# Altium PCB atfc.PcbDoc
Units mil, origin at the board's own origin, x right, y up, seen from the top; angles counter-clockwise.
Board outline 6000 x 4000 mil, 2 copper layers (Top Layer, Bottom Layer); 12 components, 0 nets, 798 pads, 0 vias.
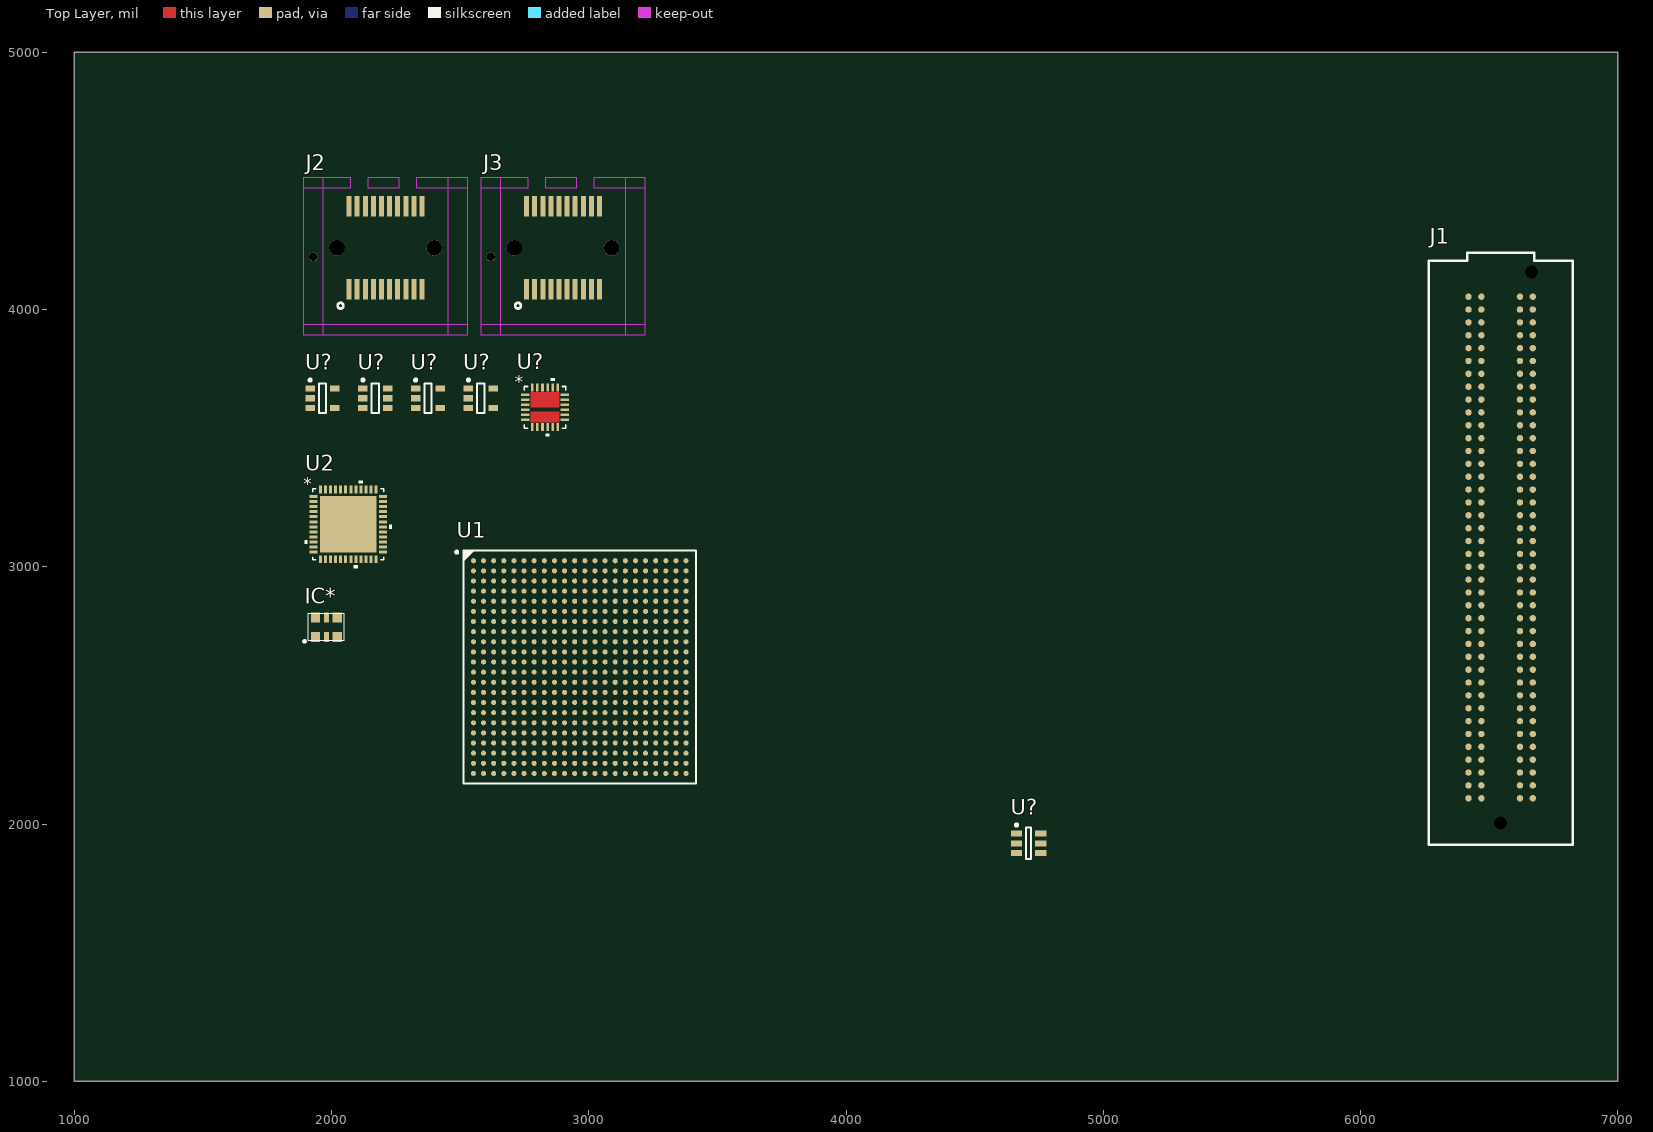
[diagram p0: Top Layer view]
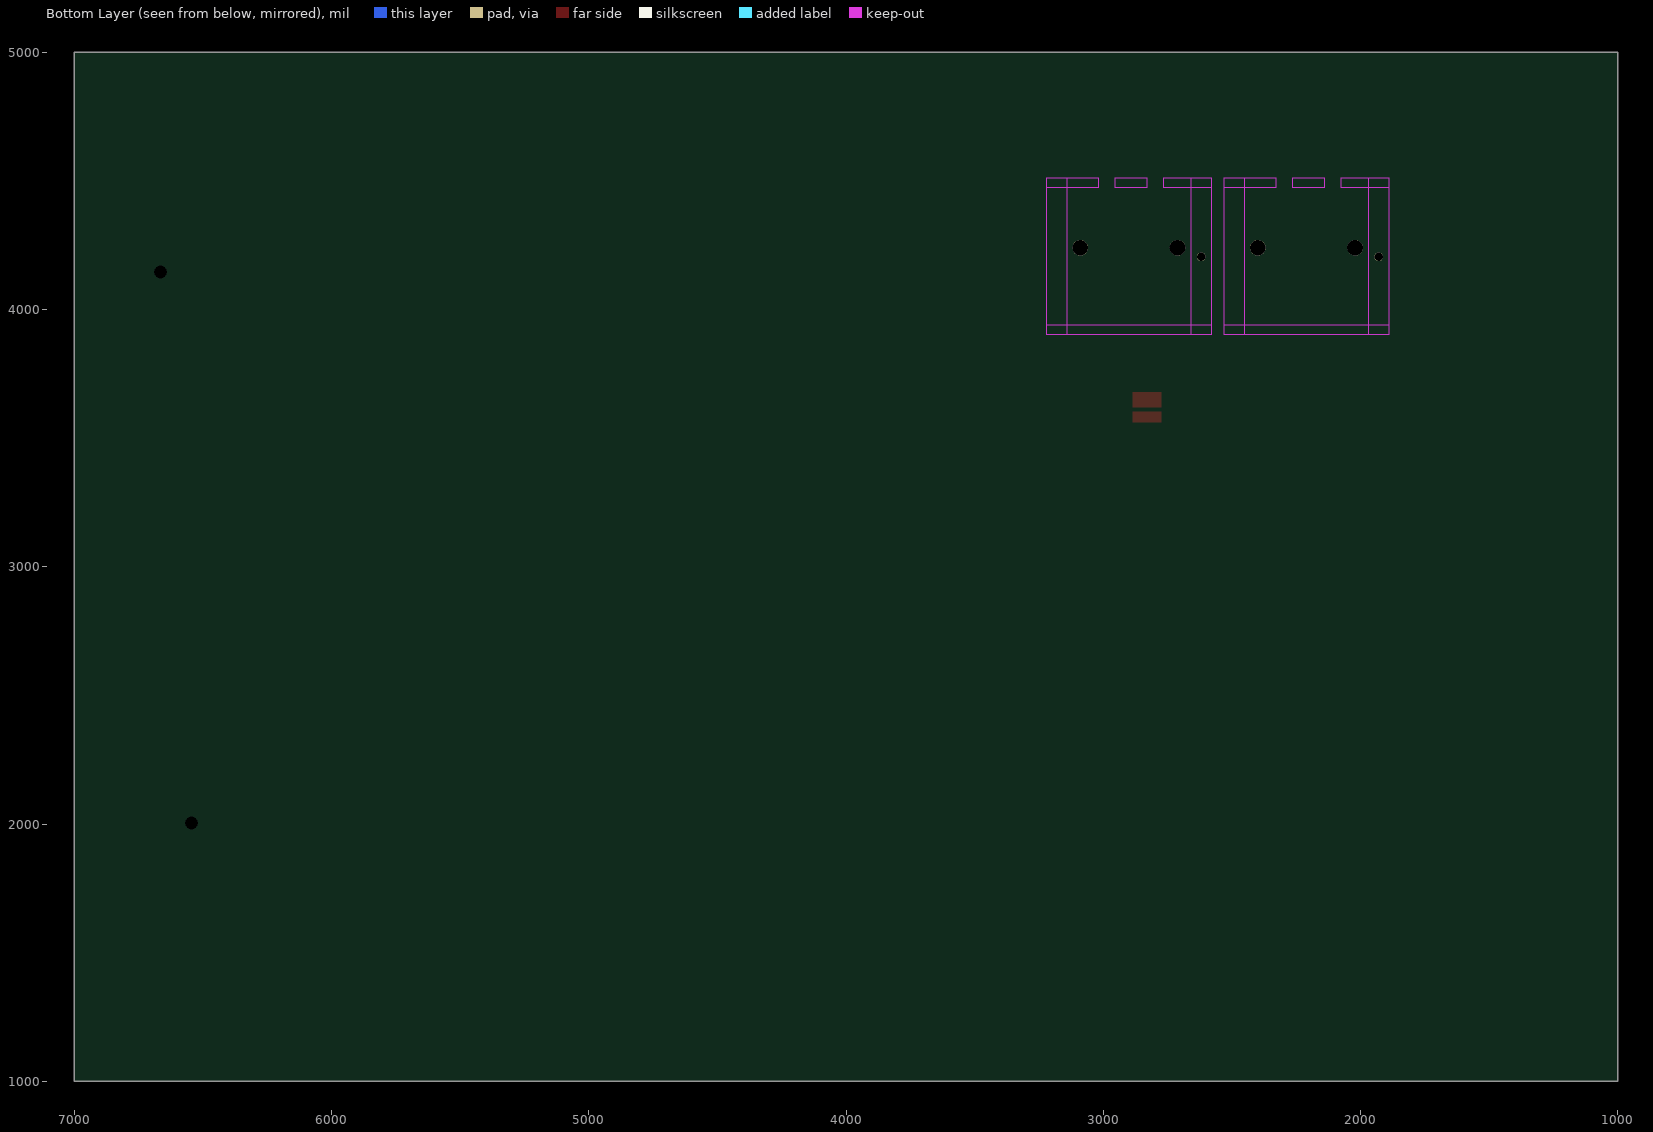
[diagram p1: Bottom Layer view, seen from below]

## Layer stack, top to bottom
Top Solder: solder mask 0.4, Solder Resist, Dk 3.5
Top Layer: signal copper 1.4
Dielectric 1: dielectric 12.6, FR-4, Dk 4.8
Bottom Layer: signal copper 1.4
Bottom Solder: solder mask 0.4, Solder Resist, Dk 3.5

## Board outline
1000,1000 7000,1000 7000,5000 1000,5000

## Design rules (kind name [scope] priority, off if disabled: settings)
Clearance [All] p1: gap=10 ignorepadtopadclearanceinfootprint=FALSE except(0: Arc-Hole Track-Hole SMDPad-Hole THPad-Hole Via-Hole Fill-Hole Poly-Hole Region-Hole Text-Hole)
PolygonConnect [All] p1: connectstyle=Relief reliefconductorwidth=10 reliefentries=4 polygonreliefangle="90 Angle" airgapwidth=10
RoutingVias [All] p1: holewidth=28 width=50 viastyle="Through Hole" minholewidth=28 minwidth=50 maxholewidth=28 maxwidth=50
SolderMaskExpansion [All] p1: expansion=4
Width [All] p1: maxlimit=10 minlimit=10 preferedwidth=10
30 further rules are at their usual default settings.

## Classes and differential pairs
component class SFP: J2 J3
component class Regulators: U1 U2
component class PWR_APD5052: U2
component class IO: IC*
component class FPGA_Banks1: U1 U2
component class FMC: J1
component class Config: U1 U2

## Components (designator, comment, footprint, x,y, rotation, side; value= is the part's Value field where it differs from the comment)
IC* "DSC1123CE1-125.0000" DSC1123_32_25 1980,2765 r0 top
J1 "ASP-134603-01" ASP-134603-01 6545,3075 r90 top
J2 "SFP+" SFP+20 2210,4205 r0 top
J3 "SFP+" SFP+20 2900,4205 r0 top
U1 "XC7A35T-1FGG484C" FGG484 2965,2610 r0 top
U2 "ADP5052ACPZ-R7" CP_48_13 2065,3165 r0 top value=Value
U? "24AA025E48T-I/OT" MCHP-SOT-23-OT6_N 4710,1925 r0 top
U? "ADP123AUJZ-R7" ADI-UJ-5_N 2375,3655 r0 top
U? "ADP123AUJZ-R7" ADI-UJ-5_N 2580,3655 r0 top
U? "ADP123AUJZ-R7" ADI-UJ-5_N 1965,3655 r0 top
U? "ADR127BUJZ-REEL7" ADI-UJ-6_N 2170,3655 r0 top
U? "ADP2384ACPZN-R7" CP_24_12 2830,3620 r0 top value=Value

## Footprints (in the part's own frame and the unit in brackets; to place one, negate y for a bottom-side part, rotate by r counter-clockwise, add the part's x,y. Pads: shape width x height; smd on the part's side, far side on the other; paste and mask are expansions set on the pad)
ADI-UJ-5_N [mm] "SOT23, 5-Leads, Body 2.9x1.6mm, Pitch 0.95mm, IPC Medium Density"
  rect 0.95x0.6 smd: 1(-1.225,0.95) 2(-1.225,0) 3(-1.225,-0.95) 4(1.225,-0.95) 5(1.225,0.95)
  silkscreen extent -1.35,-1.45 0.35,1.92, body extent -0.8,-1.45 0.8,1.45, height 1
ADI-UJ-6_N [mm] "SOT23, 6-Leads, Body 2.9x1.6mm, Pitch 0.95mm, IPC Medium Density"
  rect 0.95x0.6 smd: 1(-1.225,0.95) 2(-1.225,0) 3(-1.225,-0.95) 4(1.225,-0.95) 5(1.225,0) 6(1.225,0.95)
  silkscreen extent -1.35,-1.45 0.35,1.92, body extent -0.8,-1.45 0.8,1.45, height 1
ASP-134603-01 [mil]
  round 25 smd paste+5 mask+2: C1(975,-125) C2(925,-125) C3(875,-125) C4(825,-125) C5(775,-125) C6(725,-125) C7(675,-125) C8(625,-125) C9(575,-125) C10(525,-125) C11(475,-125) C12(425,-125) C13(375,-125) C14(325,-125) C15(275,-125) C16(225,-125) C17(175,-125) C18(125,-125) C19(75,-125) C20(25,-125) C21(-25,-125) C22(-75,-125) C23(-125,-125) C24(-175,-125) C25(-225,-125) C26(-275,-125) C27(-325,-125) C28(-375,-125) C29(-425,-125) C30(-475,-125) C31(-525,-125) C32(-575,-125) C33(-625,-125) C34(-675,-125) C35(-725,-125) C36(-775,-125) C37(-825,-125) C38(-875,-125) C39(-925,-125) C40(-975,-125) D1(975,-75) D2(925,-75) D3(875,-75) D4(825,-75) D5(775,-75) D6(725,-75) D7(675,-75) D8(625,-75) D9(575,-75) D10(525,-75) D11(475,-75) D12(425,-75) D13(375,-75) D14(325,-75) D15(275,-75) D16(225,-75) D17(175,-75) D18(125,-75) D19(75,-75) D20(25,-75) D21(-25,-75) D22(-75,-75) D23(-125,-75) D24(-175,-75) D25(-225,-75) D26(-275,-75) D27(-325,-75) D28(-375,-75) D29(-425,-75) D30(-475,-75) D31(-525,-75) D32(-575,-75) D33(-625,-75) D34(-675,-75) D35(-725,-75) D36(-775,-75) D37(-825,-75) D38(-875,-75) D39(-925,-75) D40(-975,-75) G1(975,75) G2(925,75) G3(875,75) G4(825,75) G5(775,75) G6(725,75) G7(675,75) G8(625,75) G9(575,75) G10(525,75) G11(475,75) G12(425,75) G13(375,75) G14(325,75) G15(275,75) G16(225,75) G17(175,75) G18(125,75) G19(75,75) G20(25,75) G21(-25,75) G22(-75,75) G23(-125,75) G24(-175,75) G25(-225,75) G26(-275,75) G27(-325,75) G28(-375,75) G29(-425,75) G30(-475,75) G31(-525,75) G32(-575,75) G33(-625,75) G34(-675,75) G35(-725,75) G36(-775,75) G37(-825,75) G38(-875,75) G39(-925,75) G40(-975,75) H1(975,125) H2(925,125) H3(875,125) H4(825,125) H5(775,125) H6(725,125) H7(675,125) H8(625,125) H9(575,125) H10(525,125) H11(475,125) H12(425,125) H13(375,125) H14(325,125) H15(275,125) H16(225,125) H17(175,125) H18(125,125) H19(75,125) H20(25,125) H21(-25,125) H22(-75,125) H23(-125,125) H24(-175,125) H25(-225,125) H26(-275,125) H27(-325,125) H28(-375,125) H29(-425,125) H30(-475,125) H31(-525,125) H32(-575,125) H33(-625,125) H34(-675,125) H35(-725,125) H36(-775,125) H37(-825,125) H38(-875,125) H39(-925,125) H40(-975,125)
  round 0 hole 50 unplated: MH1(1070.5,-120) MH2(-1070.5,0)
  silkscreen extent -1155,-280 1145,280, body extent -1131,-295 1151,283, height 259
CP_24_12 [mm]
  rect 0.805x0.25 smd: 1(-1.952,1.25) 2(-1.952,0.75) 3(-1.952,0.25) 4(-1.952,-0.25) 5(-1.952,-0.75) 6(-1.952,-1.25) 13(1.952,-1.25) 14(1.952,-0.75) 15(1.952,-0.25) 16(1.952,0.25) 17(1.952,0.75) 18(1.952,1.25)
  rect 0.25x0.805 smd: 7(-1.25,-1.952) 8(-0.75,-1.952) 9(-0.25,-1.952) 10(0.25,-1.952) 11(0.75,-1.952) 12(1.25,-1.952) 19(1.25,1.952) 20(0.75,1.952) 21(0.25,1.952) 22(-0.25,1.952) 23(-0.75,1.952) 24(-1.25,1.952)
  Top Layer region: -1.4,-1.5 -1.4,-0.45 1.4,-0.45 1.4,-1.5
  Top Layer region: -1.4,0 -1.4,1.5 1.4,1.5 1.4,0
  silkscreen extent -2.05,-2.86 2.05,2.86, body extent 0,0 0.25,0.25, height 0.25
CP_48_13 [mm]
  rect 0.755x0.3 smd: 1(-3.433,2.75) 2(-3.433,2.25) 3(-3.433,1.75) 4(-3.433,1.25) 5(-3.433,0.75) 6(-3.433,0.25) 7(-3.433,-0.25) 8(-3.433,-0.75) 9(-3.433,-1.25) 10(-3.433,-1.75) 11(-3.433,-2.25) 12(-3.433,-2.75) 25(3.433,-2.75) 26(3.433,-2.25) 27(3.433,-1.75) 28(3.433,-1.25) 29(3.433,-0.75) 30(3.433,-0.25) 31(3.433,0.25) 32(3.433,0.75) 33(3.433,1.25) 34(3.433,1.75) 35(3.433,2.25) 36(3.433,2.75)
  rect 0.3x0.755 smd: 13(-2.75,-3.433) 14(-2.25,-3.433) 15(-1.75,-3.433) 16(-1.25,-3.433) 17(-0.75,-3.433) 18(-0.25,-3.433) 19(0.25,-3.433) 20(0.75,-3.433) 21(1.25,-3.433) 22(1.75,-3.433) 23(2.25,-3.433) 24(2.75,-3.433) 37(2.75,3.433) 38(2.25,3.433) 39(1.75,3.433) 40(1.25,3.433) 41(0.75,3.433) 42(0.25,3.433) 43(-0.25,3.433) 44(-0.75,3.433) 45(-1.25,3.433) 46(-1.75,3.433) 47(-2.25,3.433) 48(-2.75,3.433)
  rect 5.6x5.6 smd mask-2.781: 49(0,0)
  silkscreen extent -4.32,-4.32 4.32,4.32, body extent 0,0 0.25,0.25, height 0.25
DSC1123_32_25 [mm]
  rect 0.9x1 smd: 1(-1.075,-0.95) 3(1.075,-0.95) 4(1.075,0.95) 6(-1.075,0.95)
  rect 0.5x1 smd: 2(0,-0.95) 5(0,0.95)
  silkscreen extent -2.26,-1.5 1.78,1.4, body extent -1.78,-1.27 1.78,1.4, height 0.85
FGG484 [mm] "BGA, 484-Balls, Body 23x23mm, Pitch 1mm"
  round 0.5 smd: A1(-10.5,10.5) A2(-9.5,10.5) A3(-8.5,10.5) A4(-7.5,10.5) A5(-6.5,10.5) A6(-5.5,10.5) A7(-4.5,10.5) A8(-3.5,10.5) A9(-2.5,10.5) A10(-1.5,10.5) A11(-0.5,10.5) A12(0.5,10.5) A13(1.5,10.5) A14(2.5,10.5) A15(3.5,10.5) A16(4.5,10.5) A17(5.5,10.5) A18(6.5,10.5) A19(7.5,10.5) A20(8.5,10.5) A21(9.5,10.5) A22(10.5,10.5) AA1(-10.5,-9.5) AA2(-9.5,-9.5) AA3(-8.5,-9.5) AA4(-7.5,-9.5) AA5(-6.5,-9.5) AA6(-5.5,-9.5) AA7(-4.5,-9.5) AA8(-3.5,-9.5) AA9(-2.5,-9.5) AA10(-1.5,-9.5) AA11(-0.5,-9.5) AA12(0.5,-9.5) AA13(1.5,-9.5) AA14(2.5,-9.5) AA15(3.5,-9.5) AA16(4.5,-9.5) AA17(5.5,-9.5) AA18(6.5,-9.5) AA19(7.5,-9.5) AA20(8.5,-9.5) AA21(9.5,-9.5) AA22(10.5,-9.5) AB1(-10.5,-10.5) AB2(-9.5,-10.5) AB3(-8.5,-10.5) AB4(-7.5,-10.5) AB5(-6.5,-10.5) AB6(-5.5,-10.5) AB7(-4.5,-10.5) AB8(-3.5,-10.5) AB9(-2.5,-10.5) AB10(-1.5,-10.5) AB11(-0.5,-10.5) AB12(0.5,-10.5) AB13(1.5,-10.5) AB14(2.5,-10.5) AB15(3.5,-10.5) AB16(4.5,-10.5) AB17(5.5,-10.5) AB18(6.5,-10.5) AB19(7.5,-10.5) AB20(8.5,-10.5) AB21(9.5,-10.5) AB22(10.5,-10.5) B1(-10.5,9.5) B2(-9.5,9.5) B3(-8.5,9.5) B4(-7.5,9.5) B5(-6.5,9.5) B6(-5.5,9.5) B7(-4.5,9.5) B8(-3.5,9.5) B9(-2.5,9.5) B10(-1.5,9.5) B11(-0.5,9.5) B12(0.5,9.5) B13(1.5,9.5) B14(2.5,9.5) B15(3.5,9.5) B16(4.5,9.5) B17(5.5,9.5) B18(6.5,9.5) B19(7.5,9.5) B20(8.5,9.5) B21(9.5,9.5) B22(10.5,9.5) C1(-10.5,8.5) C2(-9.5,8.5) C3(-8.5,8.5) C4(-7.5,8.5) C5(-6.5,8.5) C6(-5.5,8.5) C7(-4.5,8.5) C8(-3.5,8.5) C9(-2.5,8.5) C10(-1.5,8.5) C11(-0.5,8.5) C12(0.5,8.5) C13(1.5,8.5) C14(2.5,8.5) C15(3.5,8.5) C16(4.5,8.5) C17(5.5,8.5) C18(6.5,8.5) C19(7.5,8.5) C20(8.5,8.5) C21(9.5,8.5) C22(10.5,8.5) D1(-10.5,7.5) D2(-9.5,7.5) D3(-8.5,7.5) D4(-7.5,7.5) D5(-6.5,7.5) D6(-5.5,7.5) D7(-4.5,7.5) D8(-3.5,7.5) D9(-2.5,7.5) D10(-1.5,7.5) D11(-0.5,7.5) D12(0.5,7.5) D13(1.5,7.5) D14(2.5,7.5) D15(3.5,7.5) D16(4.5,7.5) D17(5.5,7.5) D18(6.5,7.5) D19(7.5,7.5) D20(8.5,7.5) D21(9.5,7.5) D22(10.5,7.5) E1(-10.5,6.5) E2(-9.5,6.5) E3(-8.5,6.5) E4(-7.5,6.5) E5(-6.5,6.5) E6(-5.5,6.5) E7(-4.5,6.5) E8(-3.5,6.5) E9(-2.5,6.5) E10(-1.5,6.5) E11(-0.5,6.5) E12(0.5,6.5) E13(1.5,6.5) E14(2.5,6.5) E15(3.5,6.5) E16(4.5,6.5) E17(5.5,6.5) E18(6.5,6.5) E19(7.5,6.5) E20(8.5,6.5) E21(9.5,6.5) E22(10.5,6.5) F1(-10.5,5.5) F2(-9.5,5.5) F3(-8.5,5.5) F4(-7.5,5.5) F5(-6.5,5.5) F6(-5.5,5.5) F7(-4.5,5.5) F8(-3.5,5.5) F9(-2.5,5.5) F10(-1.5,5.5) F11(-0.5,5.5) F12(0.5,5.5) F13(1.5,5.5) F14(2.5,5.5) F15(3.5,5.5) F16(4.5,5.5) F17(5.5,5.5) F18(6.5,5.5) F19(7.5,5.5) F20(8.5,5.5) F21(9.5,5.5) F22(10.5,5.5) G1(-10.5,4.5) G2(-9.5,4.5) G3(-8.5,4.5) G4(-7.5,4.5) G5(-6.5,4.5) G6(-5.5,4.5) G7(-4.5,4.5) G8(-3.5,4.5) G9(-2.5,4.5) G10(-1.5,4.5) G11(-0.5,4.5) G12(0.5,4.5) G13(1.5,4.5) G14(2.5,4.5) G15(3.5,4.5) G16(4.5,4.5) G17(5.5,4.5) G18(6.5,4.5) G19(7.5,4.5) G20(8.5,4.5) G21(9.5,4.5) G22(10.5,4.5) H1(-10.5,3.5) H2(-9.5,3.5) H3(-8.5,3.5) H4(-7.5,3.5) H5(-6.5,3.5) H6(-5.5,3.5) H7(-4.5,3.5) H8(-3.5,3.5) H9(-2.5,3.5) H10(-1.5,3.5) H11(-0.5,3.5) H12(0.5,3.5) H13(1.5,3.5) H14(2.5,3.5) H15(3.5,3.5) H16(4.5,3.5) H17(5.5,3.5) H18(6.5,3.5) H19(7.5,3.5) H20(8.5,3.5) H21(9.5,3.5) H22(10.5,3.5) J1(-10.5,2.5) J2(-9.5,2.5) J3(-8.5,2.5) J4(-7.5,2.5) J5(-6.5,2.5) J6(-5.5,2.5) J7(-4.5,2.5) J8(-3.5,2.5) J9(-2.5,2.5) J10(-1.5,2.5) J11(-0.5,2.5) J12(0.5,2.5) J13(1.5,2.5) J14(2.5,2.5) J15(3.5,2.5) J16(4.5,2.5) J17(5.5,2.5) J18(6.5,2.5) J19(7.5,2.5) J20(8.5,2.5) J21(9.5,2.5) J22(10.5,2.5) K1(-10.5,1.5) K2(-9.5,1.5) K3(-8.5,1.5) K4(-7.5,1.5) K5(-6.5,1.5) K6(-5.5,1.5) K7(-4.5,1.5) K8(-3.5,1.5) K9(-2.5,1.5) K10(-1.5,1.5) K11(-0.5,1.5) K12(0.5,1.5) K13(1.5,1.5) K14(2.5,1.5) K15(3.5,1.5) K16(4.5,1.5) K17(5.5,1.5) K18(6.5,1.5) K19(7.5,1.5) K20(8.5,1.5) K21(9.5,1.5) K22(10.5,1.5) L1(-10.5,0.5) L2(-9.5,0.5) L3(-8.5,0.5) L4(-7.5,0.5) L5(-6.5,0.5) L6(-5.5,0.5) L7(-4.5,0.5) L8(-3.5,0.5) L9(-2.5,0.5) L10(-1.5,0.5) L11(-0.5,0.5) L12(0.5,0.5) L13(1.5,0.5) L14(2.5,0.5) L15(3.5,0.5) L16(4.5,0.5) L17(5.5,0.5) L18(6.5,0.5) L19(7.5,0.5) L20(8.5,0.5) L21(9.5,0.5) L22(10.5,0.5) M1(-10.5,-0.5) M2(-9.5,-0.5) M3(-8.5,-0.5) M4(-7.5,-0.5) M5(-6.5,-0.5) M6(-5.5,-0.5) M7(-4.5,-0.5) M8(-3.5,-0.5) M9(-2.5,-0.5) M10(-1.5,-0.5) M11(-0.5,-0.5) M12(0.5,-0.5) M13(1.5,-0.5) M14(2.5,-0.5) M15(3.5,-0.5) M16(4.5,-0.5) M17(5.5,-0.5) M18(6.5,-0.5) M19(7.5,-0.5) M20(8.5,-0.5) M21(9.5,-0.5) M22(10.5,-0.5) N1(-10.5,-1.5) N2(-9.5,-1.5) N3(-8.5,-1.5) N4(-7.5,-1.5) N5(-6.5,-1.5) N6(-5.5,-1.5) N7(-4.5,-1.5) N8(-3.5,-1.5) N9(-2.5,-1.5) N10(-1.5,-1.5) N11(-0.5,-1.5) N12(0.5,-1.5) N13(1.5,-1.5) N14(2.5,-1.5) N15(3.5,-1.5) N16(4.5,-1.5) N17(5.5,-1.5) N18(6.5,-1.5) N19(7.5,-1.5) N20(8.5,-1.5) N21(9.5,-1.5) N22(10.5,-1.5) P1(-10.5,-2.5) P2(-9.5,-2.5) P3(-8.5,-2.5) P4(-7.5,-2.5) P5(-6.5,-2.5) P6(-5.5,-2.5) P7(-4.5,-2.5) P8(-3.5,-2.5) P9(-2.5,-2.5) P10(-1.5,-2.5) P11(-0.5,-2.5) P12(0.5,-2.5) P13(1.5,-2.5) P14(2.5,-2.5) P15(3.5,-2.5) P16(4.5,-2.5) P17(5.5,-2.5) P18(6.5,-2.5) P19(7.5,-2.5) P20(8.5,-2.5) P21(9.5,-2.5) P22(10.5,-2.5) R1(-10.5,-3.5) R2(-9.5,-3.5) R3(-8.5,-3.5) R4(-7.5,-3.5) R5(-6.5,-3.5) R6(-5.5,-3.5) R7(-4.5,-3.5) R8(-3.5,-3.5) R9(-2.5,-3.5) R10(-1.5,-3.5) R11(-0.5,-3.5) R12(0.5,-3.5) R13(1.5,-3.5) R14(2.5,-3.5) R15(3.5,-3.5) R16(4.5,-3.5) R17(5.5,-3.5) R18(6.5,-3.5) R19(7.5,-3.5) R20(8.5,-3.5) R21(9.5,-3.5) R22(10.5,-3.5) T1(-10.5,-4.5) T2(-9.5,-4.5) T3(-8.5,-4.5) T4(-7.5,-4.5) T5(-6.5,-4.5) T6(-5.5,-4.5) T7(-4.5,-4.5) T8(-3.5,-4.5) T9(-2.5,-4.5) T10(-1.5,-4.5) T11(-0.5,-4.5) T12(0.5,-4.5) T13(1.5,-4.5) T14(2.5,-4.5) T15(3.5,-4.5) T16(4.5,-4.5) T17(5.5,-4.5) T18(6.5,-4.5) T19(7.5,-4.5) T20(8.5,-4.5) T21(9.5,-4.5) T22(10.5,-4.5) U1(-10.5,-5.5) U2(-9.5,-5.5) U3(-8.5,-5.5) U4(-7.5,-5.5) U5(-6.5,-5.5) U6(-5.5,-5.5) U7(-4.5,-5.5) U8(-3.5,-5.5) U9(-2.5,-5.5) U10(-1.5,-5.5) U11(-0.5,-5.5) U12(0.5,-5.5) U13(1.5,-5.5) U14(2.5,-5.5) U15(3.5,-5.5) U16(4.5,-5.5) U17(5.5,-5.5) U18(6.5,-5.5) U19(7.5,-5.5) U20(8.5,-5.5) U21(9.5,-5.5) U22(10.5,-5.5) V1(-10.5,-6.5) V2(-9.5,-6.5) V3(-8.5,-6.5) V4(-7.5,-6.5) V5(-6.5,-6.5) V6(-5.5,-6.5) V7(-4.5,-6.5) V8(-3.5,-6.5) V9(-2.5,-6.5) V10(-1.5,-6.5) V11(-0.5,-6.5) V12(0.5,-6.5) V13(1.5,-6.5) V14(2.5,-6.5) V15(3.5,-6.5) V16(4.5,-6.5) V17(5.5,-6.5) V18(6.5,-6.5) V19(7.5,-6.5) V20(8.5,-6.5) V21(9.5,-6.5) V22(10.5,-6.5) W1(-10.5,-7.5) W2(-9.5,-7.5) W3(-8.5,-7.5) W4(-7.5,-7.5) W5(-6.5,-7.5) W6(-5.5,-7.5) W7(-4.5,-7.5) W8(-3.5,-7.5) W9(-2.5,-7.5) W10(-1.5,-7.5) W11(-0.5,-7.5) W12(0.5,-7.5) W13(1.5,-7.5) W14(2.5,-7.5) W15(3.5,-7.5) W16(4.5,-7.5) W17(5.5,-7.5) W18(6.5,-7.5) W19(7.5,-7.5) W20(8.5,-7.5) W21(9.5,-7.5) W22(10.5,-7.5) Y1(-10.5,-8.5) Y2(-9.5,-8.5) Y3(-8.5,-8.5) Y4(-7.5,-8.5) Y5(-6.5,-8.5) Y6(-5.5,-8.5) Y7(-4.5,-8.5) Y8(-3.5,-8.5) Y9(-2.5,-8.5) Y10(-1.5,-8.5) Y11(-0.5,-8.5) Y12(0.5,-8.5) Y13(1.5,-8.5) Y14(2.5,-8.5) Y15(3.5,-8.5) Y16(4.5,-8.5) Y17(5.5,-8.5) Y18(6.5,-8.5) Y19(7.5,-8.5) Y20(8.5,-8.5) Y21(9.5,-8.5) Y22(10.5,-8.5)
  silkscreen extent -12.27,-11.5 11.5,11.5, body extent -11.5,-11.5 11.5,11.5, height 2.6
MCHP-SOT-23-OT6_N [mm] "SOT23, 6-Leads, Body 2.9x1.55mm, Pitch 0.95mm, IPC Medium Density"
  rect 1.1x0.6 smd: 1(-1.2,0.95) 2(-1.2,0) 3(-1.2,-0.95) 4(1.2,-0.95) 5(1.2,0) 6(1.2,0.95)
  silkscreen extent -1.32,-1.55 0.25,1.92, body extent -0.9,-1.55 0.9,1.55, height 1.45
SFP+20 [mm]
  rect 0.5x2 smd: 1(-3.6,-3.2) 2(-2.8,-3.2) 3(-2,-3.2) 4(-1.2,-3.2) 5(-0.4,-3.2) 6(0.4,-3.2) 7(1.2,-3.2) 8(2,-3.2) 9(2.8,-3.2) 10(3.6,-3.2) 11(3.6,5) 12(2.8,5) 13(2,5) 14(1.2,5) 15(0.4,5) 16(-0.4,5) 17(-1.2,5) 18(-2,5) 19(-2.8,5) 20(-3.6,5)
  round 0.85 hole 0.85 paste+0 mask+0: ""(-7.13,0)
  round 1.55 hole 1.55 paste+0 mask+0: ""(-4.8,0.9) ""(4.8,0.9)
  Keep-Out Layer region: 3.05,6.8 8.12,6.8 8.12,7.8 3.05,7.8
  Keep-Out Layer region: -8.13,6.8 -3.45,6.8 -3.45,7.8 -8.13,7.8
  Keep-Out Layer region: -8.13,-7.7 8.13,-7.7 8.13,-6.7 -8.13,-6.7
  Keep-Out Layer region: -1.75,6.8 1.35,6.8 1.35,7.8 -1.75,7.8
  Keep-Out Layer region: 6.13,-7.7 8.12,-7.7 8.12,7.8 6.13,7.8
  Keep-Out Layer region: -8.13,-7.7 -6.13,-7.7 -6.13,7.8 -8.13,7.8
  silkscreen extent -4.73,-5.11 -4.16,-4.54

## Part data
IC*: library part DSC1123CE1-125, "Standard Clock Oscillators Oscillator Hi Perf -20C-70C 50ppm", PartNo=DSC1123CE1-125.0000
J1: "0.050\" PITCH SOCKET ARRAY ASSEMBLY.", MANUFACTURER=SAMTEC, CREATED="February 27, 2014 - Wedny Xin", PCB DECAL=ASP-134603-01
U1: "Artix-7 FPGA, 250 User I/Os, 4 GTP, 484-Ball BGA, Speed Grade 1, Commercial Grade, Pb-Free", MANUFACTURER=Xilinx, Operating Temperature Range=Commercial, Available User I/O=250, Clock Mgmt Tiles (CMTs)=5, ComponentLink1Description="Manufacturer URL", ComponentLink1URL=http://www.xilinx.com/, ComponentLink2Description=Datasheet, ComponentLink2URL=http://www.xilinx.com/support/documentation/data_sheets/ds180_7Series_Overview.pdf, ComponentLink3Description="Package Specification", ComponentLink3URL=http://www.xilinx.com/support/documentation/user_guides/ug475_7Series_Pkg_Pinout.pdf, ComponentLink4Description="DC and Switching Characteristics", ComponentLink4URL=http://www.xilinx.com/support/documentation/data_sheets/ds181_Artix_7_Data_Sheet.pdf, ComponentLink5Description="Package File", ComponentLink5URL=http://www.xilinx.com/support/packagefiles/a7packages/xc7a200tsbg484pkg.txt, ComponentLink6Description="Packaging and Pinout", ComponentLink6URL=http://www.xilinx.com/support/documentation/user_guides/ug475_7Series_Pkg_Pinout.pdf, DatasheetVersion=v1.15, GTP=4, Logic Cells=33280, Maximum Distributed RAM="400 Kb", Mounting Technology="Surface Mount", NexusDeviceID=XC7A35T-1FGG484C, PackageDescription="484-Ball Wire-Bond Fine-Pitch BGA, Body 23 x 23 mm, Pitch 1 mm", PackageReference=FGG484, PackageVersion="Rev. 1.11", PartNumber=XC7A35T-1FGG484C, Speed Grades=1, Total Block RAM="1800 Kb"
U2 U?: "Imported", RefDes=RefDes, Type=Type
U?: "2K bits I2C™ Serial EEPROM with EUI-48™ Node Identity, 1.7 to 5.5 V, 400 kHz, -40 to 85 degC, 6-pin SOT-23 (OT6), Tape and Reel", MANUFACTURER=Microchip, Supplier Part Number 1=24AA025E48T-I/OTTR-ND, ComponentLink1Description="Manufacturer URL", ComponentLink1URL=http://www.microchip.com, ComponentLink2Description=Datasheet, ComponentLink2URL=http://ww1.microchip.com/downloads/en/DeviceDoc/22124D.pdf, ComponentLink3Description="Package Specification", ComponentLink3URL=http://www.microchip.com/stellent/groups/techpub_sg/documents/packagingspec/en012702.pdf, ComponentLink4Description="Product URL", ComponentLink4URL=http://www.microchip.com/24AA025E48, DatasheetVersion="Rev. D", Mounting Technology="Surface Mount", PackageDescription="6-Lead Plastic Small Outline Transistor, 2.9 x 1.55 mm Body, 0.95 mm Pitch", PackageReference=SOT-23-OT6, PackageVersion=C04-028B, PartNumber=24AA025E48T-I/OT, Supplier 1=Digi-Key, Supplier 2=Digi-Key, Supplier 3=Digi-Key, Supplier 4=Farnell, Supplier 5=Farnell, Supplier 6=Newark, Supplier 7=Newark, Supplier 8=Mouser, Supplier Part Number 2=24AA025E48T-I/OTCT-ND, Supplier Part Number 3=24AA025E48T-I/OTDKR-ND, Supplier Part Number 4=1814891RL, Supplier Part Number 5=1814891, Supplier Part Number 6=74R6951, Supplier Part Number 7=73R8708, Supplier Part Number 8=579-24AA025E48T-I/OT
U? U? U?: "300 mA, Low Quiescent Current, CMOS Linear Regulator, 2.3 to 5.5 V Vin, 0.8 to 5 V Vout, Industrial, 5-pin SOT23 (UJ-5), Reel", MANUFACTURER="Analog Devices", Supplier Part Number 1=ADP123AUJZ-R7TR-ND, Supply Current IGND @ Small Load=45uA, Code_JEDEC=MO-193-AB, ComponentLink1Description="Manufacturer URL", ComponentLink1URL=http://www.analog.com/en/index.html, ComponentLink2Description=Datasheet, ComponentLink2URL=http://www.analog.com/static/imported-files/data_sheets/ADP122_123.pdf, ComponentLink3Description="Package Specification", ComponentLink3URL=http:/www.analog.com/static/imported-files/packages/PKG_PDF/TSOT(UJ)/UJ_5.pdf, ComponentLink4Description="URL Link1", ComponentLink4URL="Product URL:http://www.analog.com/en/ADP123/productSearch.html", DatasheetVersion="Rev. E", Iout max=300mA, Mounting Technology="Surface Mount", PackageDescription="5-Pin Thin Small Outline Transistor Package, Body 2.9 x 1.6 mm, Pitch 0.95 mm", PackageReference=UJ-5, PackageVersion="100708-A, 10/2008", Packing=Reel, PartNumber=ADP123AUJZ-R7, Supplier 1=Digi-Key, Supplier 2=Digi-Key, Supplier 3=Digi-Key, Supplier 4=Farnell, Supplier 5=Newark, Supplier 6=Newark, Supplier 7=Mouser, Supplier Part Number 2=ADP123AUJZ-R7CT-ND, Supplier Part Number 3=ADP123AUJZ-R7DKR-ND, Supplier Part Number 4=2296039, Supplier Part Number 5=12T2968, Supplier Part Number 6=52R8082, Supplier Part Number 7=584-ADP123AUJZ-R7, Vin (max) (V)=5.5, Vin (min) (V)=2.3, Vout Adjustable Range="0.8V to 5V"
U?: "Precision, Micropower LDO Voltage Reference in TSOT, 1.25 V Output, 2.7 to 18 V Supply, Industrial, 6-pin SOT23 (UJ-6), Reel", MANUFACTURER="Analog Devices", Operating Temp Range="-40 to 125 degC", Supplier Part Number 1=ADR127BUJZ-REEL7TR-ND, Code_JEDEC=MO-193-AA, ComponentLink1Description="Manufacturer URL", ComponentLink1URL=http://www.analog.com/en/index.html, ComponentLink2Description=Datasheet, ComponentLink2URL=http://www.analog.com/static/imported-files/data_sheets/ADR121_125_127.pdf, ComponentLink3Description="Package Specification", ComponentLink3URL=http://www.analog.com/static/imported-files/packages/PKG_PDF/TSOT(UJ)/UJ_6.pdf, ComponentLink4Description="URL Link1", ComponentLink4URL="Product URL:http://www.analog.com/en/special-linear-functions/voltage-references/adr127/products/product.html", DatasheetVersion="Rev. B", Max V Supply (V)=18, Min V Supply (V)=2.7, Mounting Technology="Surface Mount", PackageDescription="6-Pin Thin Small Outline Transistor Package, Body 2.9 x 1.6 mm, Pitch 0.95 mm", PackageReference=UJ-6, PackageVersion=Dec-04, Packing=Reel, PartNumber=ADR127BUJZ-REEL7, Ref Out TC (ppm/C)=3, Supplier 1=Digi-Key, Supplier 2=Digi-Key, Supplier 3=Digi-Key, Supplier 4=Farnell, Supplier 5=Mouser, Supplier Part Number 2=ADR127BUJZ-REEL7CT-ND, Supplier Part Number 3=ADR127BUJZ-REEL7DKR-ND, Supplier Part Number 4=2312969, Supplier Part Number 5=584-ADR127BUJZ-R7, Vout=1.25V

## Nets (pads, with @x,y where several pads share a name; then routed paths per layer and width w, separated by ;. In a path a pad name is that pad's centre, name@x,y a point inside that pad or via, vN(x,y) a via of type N, cw(c..) or ccw(c..) an arc to the next point about the centre after c; other vN are vias at no path point)
pads on no net: IC*.1 IC*.2 IC*.3 IC*.4 IC*.5 IC*.6 J1.C1 J1.C2 J1.C3 J1.C4 J1.C5 J1.C6 J1.C7 J1.C8 J1.C9 J1.C10 J1.C11 J1.C12 J1.C13 J1.C14 J1.C15 J1.C16 J1.C17 J1.C18 J1.C19 J1.C20 J1.C21 J1.C22 J1.C23 J1.C24 J1.C25 J1.C26 J1.C27 J1.C28 J1.C29 J1.C30 J1.C31 J1.C32 J1.C33 J1.C34 J1.C35 J1.C36 J1.C37 J1.C38 J1.C39 J1.C40 J1.D1 J1.D2 J1.D3 J1.D4 J1.D5 J1.D6 J1.D7 J1.D8 J1.D9 J1.D10 J1.D11 J1.D12 J1.D13 J1.D14 J1.D15 J1.D16 J1.D17 J1.D18 J1.D19 J1.D20 J1.D21 J1.D22 J1.D23 J1.D24 J1.D25 J1.D26 J1.D27 J1.D28 J1.D29 J1.D30 J1.D31 J1.D32 J1.D33 J1.D34 J1.D35 J1.D36 J1.D37 J1.D38 J1.D39 J1.D40 J1.G1 J1.G2 J1.G3 J1.G4 J1.G5 J1.G6 J1.G7 J1.G8 J1.G9 J1.G10 J1.G11 J1.G12 J1.G13 J1.G14 J1.G15 J1.G16 J1.G17 J1.G18 J1.G19 J1.G20 J1.G21 J1.G22 J1.G23 J1.G24 J1.G25 J1.G26 J1.G27 J1.G28 J1.G29 J1.G30 J1.G31 J1.G32 J1.G33 J1.G34 J1.G35 J1.G36 J1.G37 J1.G38 J1.G39 J1.G40 J1.H1 J1.H2 J1.H3 J1.H4 J1.H5 J1.H6 J1.H7 J1.H8 J1.H9 J1.H10 J1.H11 J1.H12 J1.H13 J1.H14 J1.H15 J1.H16 J1.H17 J1.H18 J1.H19 J1.H20 J1.H21 J1.H22 J1.H23 J1.H24 J1.H25 J1.H26 J1.H27 J1.H28 J1.H29 J1.H30 J1.H31 J1.H32 J1.H33 J1.H34 J1.H35 J1.H36 J1.H37 J1.H38 J1.H39 J1.H40 J1.MH1 J1.MH2 J2. J2.1 J2.2 J2.3 J2.4 J2.5 J2.6 J2.7 J2.8 J2.9 J2.10 J2.11 J2.12 J2.13 J2.14 J2.15 J2.16 J2.17 J2.18 J2.19 J2.20 J3. J3.1 J3.2 J3.3 J3.4 J3.5 J3.6 J3.7 J3.8 J3.9 J3.10 J3.11 J3.12 J3.13 J3.14 J3.15 J3.16 J3.17 J3.18 J3.19 J3.20 U1.A1 U1.A2 U1.A3 U1.A4 U1.A5 U1.A6 U1.A7 U1.A8 U1.A9 U1.A10 U1.A11 U1.A12 U1.A13 U1.A14 U1.A15 U1.A16 U1.A17 U1.A18 U1.A19 U1.A20 U1.A21 U1.A22 U1.AA1 U1.AA2 U1.AA3 U1.AA4 U1.AA5 U1.AA6 U1.AA7 U1.AA8 U1.AA9 U1.AA10 U1.AA11 U1.AA12 U1.AA13 U1.AA14 U1.AA15 U1.AA16 U1.AA17 U1.AA18 U1.AA19 U1.AA20 U1.AA21 U1.AA22 U1.AB1 U1.AB2 U1.AB3 U1.AB4 U1.AB5 U1.AB6 U1.AB7 U1.AB8 U1.AB9 U1.AB10 U1.AB11 U1.AB12 U1.AB13 U1.AB14 U1.AB15 U1.AB16 U1.AB17 U1.AB18 U1.AB19 U1.AB20 U1.AB21 U1.AB22 U1.B1 U1.B2 U1.B3 U1.B4 U1.B5 U1.B6 U1.B7 U1.B8 U1.B9 U1.B10 U1.B11 U1.B12 U1.B13 U1.B14 U1.B15 U1.B16 U1.B17 U1.B18 U1.B19 U1.B20 U1.B21 U1.B22 U1.C1 U1.C2 U1.C3 U1.C4 U1.C5 U1.C6 U1.C7 U1.C8 U1.C9 U1.C10 U1.C11 U1.C12 U1.C13 U1.C14 U1.C15 U1.C16 U1.C17 U1.C18 U1.C19 U1.C20 U1.C21 U1.C22 U1.D1 U1.D2 U1.D3 U1.D4 U1.D5 U1.D6 U1.D7 U1.D8 U1.D9 U1.D10 U1.D11 U1.D12 U1.D13 U1.D14 U1.D15 U1.D16 U1.D17 U1.D18 U1.D19 U1.D20 U1.D21 U1.D22 U1.E1 U1.E2 U1.E3 U1.E4 U1.E5 U1.E6 U1.E7 U1.E8 U1.E9 U1.E10 U1.E11 U1.E12 U1.E13 U1.E14 U1.E15 U1.E16 U1.E17 U1.E18 U1.E19 U1.E20 U1.E21 U1.E22 U1.F1 U1.F2 U1.F3 U1.F4 U1.F5 U1.F6 U1.F7 U1.F8 U1.F9 U1.F10 U1.F11 U1.F12 U1.F13 U1.F14 U1.F15 U1.F16 U1.F17 U1.F18 U1.F19 U1.F20 U1.F21 U1.F22 U1.G1 U1.G2 U1.G3 U1.G4 U1.G5 U1.G6 U1.G7 U1.G8 U1.G9 U1.G10 U1.G11 U1.G12 U1.G13 U1.G14 U1.G15 U1.G16 U1.G17 U1.G18 U1.G19 U1.G20 U1.G21 U1.G22 U1.H1 U1.H2 U1.H3 U1.H4 U1.H5 U1.H6 U1.H7 U1.H8 U1.H9 U1.H10 U1.H11 U1.H12 U1.H13 U1.H14 U1.H15 U1.H16 U1.H17 U1.H18 U1.H19 U1.H20 U1.H21 U1.H22 U1.J1 U1.J2 U1.J3 U1.J4 U1.J5 U1.J6 U1.J7 U1.J8 U1.J9 U1.J10 U1.J11 U1.J12 U1.J13 U1.J14 U1.J15 U1.J16 U1.J17 U1.J18 U1.J19 U1.J20 U1.J21 U1.J22 U1.K1 U1.K2 U1.K3 U1.K4 U1.K5 U1.K6 U1.K7 U1.K8 U1.K9 U1.K10 U1.K11 U1.K12 U1.K13 U1.K14 U1.K15 U1.K16 U1.K17 U1.K18 U1.K19 U1.K20 U1.K21 U1.K22 U1.L1 U1.L2 U1.L3 U1.L4 U1.L5 U1.L6 U1.L7 U1.L8 U1.L9 U1.L10 U1.L11 U1.L12 U1.L13 U1.L14 U1.L15 U1.L16 U1.L17 U1.L18 U1.L19 U1.L20 U1.L21 U1.L22 U1.M1 U1.M2 U1.M3 U1.M4 U1.M5 U1.M6 U1.M7 U1.M8 U1.M9 U1.M10 U1.M11 U1.M12 U1.M13 U1.M14 U1.M15 U1.M16 U1.M17 U1.M18 U1.M19 U1.M20 U1.M21 U1.M22 U1.N1 U1.N2 U1.N3 U1.N4 U1.N5 U1.N6 U1.N7 U1.N8 U1.N9 U1.N10 U1.N11 U1.N12 U1.N13 U1.N14 U1.N15 U1.N16 U1.N17 U1.N18 U1.N19 U1.N20 U1.N21 U1.N22 U1.P1 U1.P2 U1.P3 U1.P4 U1.P5 U1.P6 U1.P7 U1.P8 U1.P9 U1.P10 U1.P11 U1.P12 U1.P13 U1.P14 U1.P15 U1.P16 U1.P17 U1.P18 U1.P19 U1.P20 U1.P21 U1.P22 U1.R1 U1.R2 U1.R3 U1.R4 U1.R5 U1.R6 U1.R7 U1.R8 U1.R9 U1.R10 U1.R11 U1.R12 U1.R13 U1.R14 U1.R15 U1.R16 U1.R17 U1.R18 U1.R19 U1.R20 U1.R21 U1.R22 U1.T1 U1.T2 U1.T3 U1.T4 U1.T5 U1.T6 U1.T7 U1.T8 U1.T9 U1.T10 U1.T11 U1.T12 U1.T13 U1.T14 U1.T15 U1.T16 U1.T17 U1.T18 U1.T19 U1.T20 U1.T21 U1.T22 U1.U1 U1.U2 U1.U3 U1.U4 U1.U5 U1.U6 U1.U7 U1.U8 U1.U9 U1.U10 U1.U11 U1.U12 U1.U13 U1.U14 U1.U15 U1.U16 U1.U17 U1.U18 U1.U19 U1.U20 U1.U21 U1.U22 U1.V1 U1.V2 U1.V3 U1.V4 U1.V5 U1.V6 U1.V7 U1.V8 U1.V9 U1.V10 U1.V11 U1.V12 U1.V13 U1.V14 U1.V15 U1.V16 U1.V17 U1.V18 U1.V19 U1.V20 U1.V21 U1.V22 U1.W1 U1.W2 U1.W3 U1.W4 U1.W5 U1.W6 U1.W7 U1.W8 U1.W9 U1.W10 U1.W11 U1.W12 U1.W13 U1.W14 U1.W15 U1.W16 U1.W17 U1.W18 U1.W19 U1.W20 U1.W21 U1.W22 U1.Y1 U1.Y2 U1.Y3 U1.Y4 U1.Y5 U1.Y6 U1.Y7 U1.Y8 U1.Y9 U1.Y10 U1.Y11 U1.Y12 U1.Y13 U1.Y14 U1.Y15 U1.Y16 U1.Y17 U1.Y18 U1.Y19 U1.Y20 U1.Y21 U1.Y22 U2.1 U2.2 U2.3 U2.4 U2.5 U2.6 U2.7 U2.8 U2.9 U2.10 U2.11 U2.12 U2.13 U2.14 U2.15 U2.16 U2.17 U2.18 U2.19 U2.20 U2.21 U2.22 U2.23 U2.24 U2.25 U2.26 U2.27 U2.28 U2.29 U2.30 U2.31 U2.32 U2.33 U2.34 U2.35 U2.36 U2.37 U2.38 U2.39 U2.40 U2.41 U2.42 U2.43 U2.44 U2.45 U2.46 U2.47 U2.48 U2.49 U?.1 U?.2 U?.3 U?.4 U?.5 U?.6 U?.7 U?.8 U?.9 U?.10 U?.11 U?.12 U?.13 U?.14 U?.15 U?.16 U?.17 U?.18 U?.19 U?.20 U?.21 U?.22 U?.23 U?.24

## Text inside footprints (layer, text, board x,y; h text height)
U2: Top Overlay "*" at 1890,3298.11 h50; Mechanical 13 "*" at 1890,3298.11 h50
U?: Top Overlay "*" at 2712.29,3694.06 h50; Mechanical 13 "*" at 2712.29,3694.06 h50